# EAGLE board VNP (EAGLE 9.6.2)
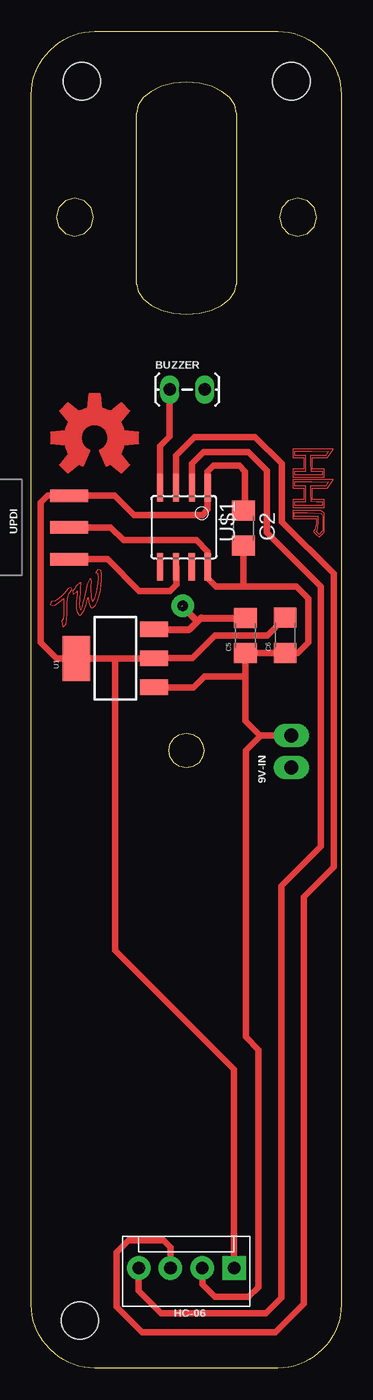
[diagram p0: board, top side]
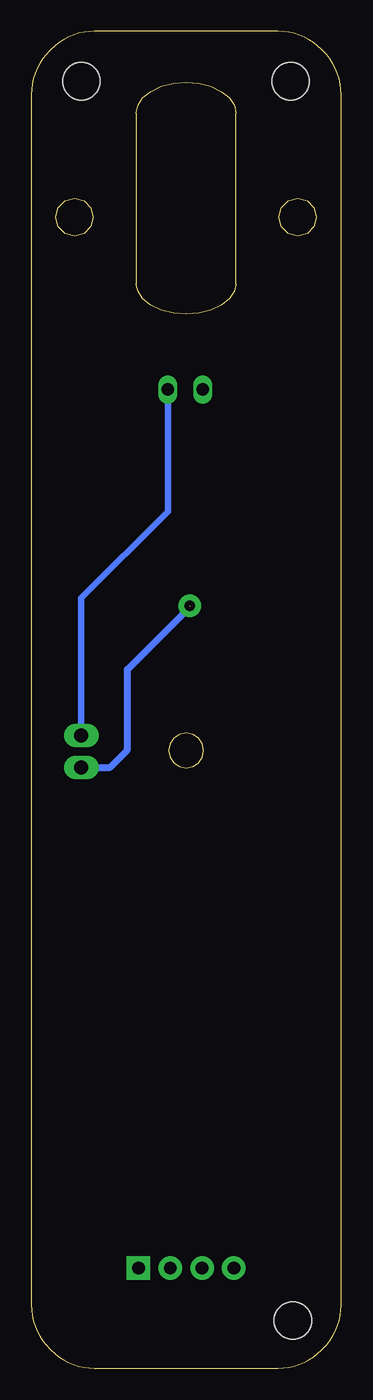
[diagram p1: board, bottom side, seen from below]

Size 24.76 x 106.68 mm. Coordinates in mm from the lower left corner, seen from the top.
Outline: 8.4,86.52 8.53,85.95 8.92,85.35 9.55,84.84 10.39,84.44 11.36,84.19 12.39,84.1 13.42,84.19 14.39,84.44 15.22,84.84 15.85,85.35 16.25,85.95 16.4,86.52
Outline: 16.4,100.13 16.25,100.77
Outline: 16.25,100.77 15.85,101.37 15.22,101.88 14.39,102.28 13.42,102.53 12.39,102.62 11.36,102.53
Outline: 11.36,102.53 10.39,102.28 9.55,101.88 8.92,101.37 8.53,100.77 8.4,100.13
Outline: 16.4,100.14 16.4,86.52
Outline: 8.4,86.52 8.4,100.14
Outline: 4.23,93.15 4.77,92.6 4.98,91.85 4.77,91.1
Outline: 4.23,93.15 4.23,93.15
Outline: 4.23,93.15 3.48,93.35 2.73,93.15 2.18,92.6 1.98,91.85 2.18,91.1 2.73,90.55 3.48,90.35 4.23,90.55 4.77,91.1
Outline: 4.77,91.1 4.77,91.1
Outline: 11.85,50.58 11.4,50.27 11.1,49.82 10.99,49.29 11.1,48.75 11.4,48.3 11.85,48 12.39,47.89 12.92,48 13.37,48.3 13.68,48.75 13.78,49.29 13.68,49.82 13.37,50.27 12.92,50.57 12.39,50.68 11.85,50.57
Outline: 23.22,105.21 23.29,105.14 arc-45 24.76,101.61 24.76,5.07 arc-45 23.29,1.54 23.22,1.46 arc-45 19.69,0 5.07,0 arc-45 1.54,1.46 1.46,1.54 arc-45 0,5.07 0,101.61 arc-45 1.46,105.14 1.54,105.21 arc-45 5.07,106.68 19.69,106.68 arc-45 23.22,105.21
Outline: 22.8,91.85 22.6,92.6 22.05,93.15 21.3,93.35 20.55,93.15 20,92.6 19.8,91.85 20,91.1 20.55,90.55 21.3,90.35 22.05,90.55 22.6,91.1 22.8,91.85
Copper layers (1*16): Top 0.035mm / dielectric 1.5mm / Bottom 0.035mm
Design rules "OthermillDRC_30_deg_v2": minimum track width 6mil, minimum drill 0.8mm, track to track 6mil, track to pad 6mil, pad to pad 6mil, via to via 6mil, smd to smd 0mil, copper to edge 0mil, drill to drill 6mil, minimum pad ring 10mil, minimum via ring 10mil, stop-mask expansion 1mil, vias tented up to drill 30mil, thermal gap 6mil
Net classes: 0 default: width 0.457 mm; 2 vcc: width 0.559 mm
Holes 3 mm at 3.88,3.8 4.05,102.71 20.76,102.71

## Footprints (pad centres in the part's own frame; a part is rotated, then mirrored left to right if it is on the bottom)
1X02_LONGPADS = drill 1.118 pad 1.88 long: 1 0,0; 2 2.54,0
1X02_LOCK_LONGPADS = drill 1.016 long: 1 -0.127,0; 2 2.667,0
C1206 = smd 1.6 x 1.8: 1 -1.4,0; 2 1.4,0
1206 = smd 1.6 x 1.8: 1 -1.4,0; 2 1.4,0
MOLEX-1X4 = drill 1.016 pad 1.88 square: 1 0,0 | drill 1.016 pad 1.88: 2 2.54,0; 3 5.08,0; 4 7.62,0
SOT223 = smd 1.219 x 2.235: 1 -2.311,-3.099; 2 0,-3.099; 3 2.311,-3.099 | smd 3.6 x 2.2: 4 0,3.099
SOIC8 = smd 0.5 x 2.2: 1 -1.905,-3.154; 2 -0.645,-3.154; 3 0.625,-3.154; 4 1.895,-3.154; 5 1.905,3.154; 6 0.635,3.154; 7 -0.635,3.154; 8 -1.905,3.154
1X03_SMD_RA_MALE = smd 1 x 3: 1 -2.54,5; 2 0,5; 3 2.54,5

## Placement (x,y rotation side)
9V-IN  [1X02_LONGPADS]  20.76,47.94 90 top
BUZZER  [1X02_LOCK_LONGPADS]  11.19,78.1 0 top
C2  1uf  [C1206]  16.95,67.04 270 top
C5  10uf  [1206]  17.1,58.47 90 top
C6  10uf  [1206]  20.27,58.49 90 top
HC-06  [MOLEX-1X4]  16.2,8 180 top
U1  VR  [SOT223]  6.7,56.64 90 top
U$1  UC_ATTINY412SI  [SOIC8]  12.19,67.1 180 top
U$2  [OSHW-LOGO-L_COPPER]  5.06,74.24 0 top
UPDI  [1X03_SMD_RA_MALE]  -1.98,67.09 270 top

## Library data of the parts
9V-IN BUZZER = SparkFun-Connectors
C2 U1 = eagle_fab
C5 C6 = 01_SparkFun
HC-06 = SparkFun-Connectors; PROD_ID: CONN-08186; SF_ID: PRT-08231
U$1 = fab_new
U$2 = SparkFun-Aesthetics
UPDI = SparkFun-Connectors; PROD_ID: CONN-10925

## Nets
GND: 9V-IN.2 BUZZER.2 C2.2 C5.1 C6.1 HC-06.2 U1.1 U$1.8 UPDI.2
N$1 [vcc]: 9V-IN.1 C5.2 U1.3
N$2: U$1.6 UPDI.3
N$3: BUZZER.1 U$1.4
N$4: HC-06.3 U$1.3
N$5: HC-06.4 U$1.2
N$8: C2.1 C6.2 HC-06.1 U1.2 U1.4 U$1.1 UPDI.1

## Tracks (layer width: path | path; a pad name or v marks a point on that pad's centre or on a via)
GND
  Top 0.508: 9V-IN.2 18.27,50.48 | 17.11,55.19 17.11,51.64 18.27,50.48 | 17.11,55.19 C5.1 20.25,57.07 C6.1 20.3,57.06 21.3,57.06 22.14,57.89 22.14,61.42 21.17,62.38 16.95,62.38 | 18.27,50.48 18.3,50.45 17.13,49.29 17.13,26.42 18.14,25.42 18.14,6.47 17.36,5.69 14.65,5.69 13.66,6.69 HC-06.2 | 16.95,62.38 14.77,62.38 14.09,63.06 14.09,63.13 14.09,65.17 13.2,66.06 7.37,66.06 6.34,67.09 UPDI.2 | 16.95,62.38 C2.2 | U1.1 12.97,54.33 13.83,55.19 17.11,55.19
  Top 0.559: U$1.8 14.09,63.13
  Bottom 0.508: BUZZER.2 13.85,68.36 20.76,61.45 9V-IN.2
N$1  (1 unrouted)
  Top 0.559: U1.3 12.65,58.96 13.27,59.58 | C5.2 13.56,59.87 13.27,59.58 | 13.27,59.58 12.07,60.78 12.07,60.85
  Bottom 0.559: 9V-IN.1 18.47,47.94 17.08,49.33 17.08,55.76 12.04,60.79
N$2
  Top 0.508: UPDI.3 6.08,64.55 8.6,62.03 11.07,62.03 11.58,62.55 11.58,63.91 U$1.6
N$3
  Top 0.508: 10.26,70.28 U$1.4 10.28,70.26 10.28,73.57 11.06,74.35 BUZZER.1
N$4
  Top 0.508: U$1.3 11.56,72.83 13.05,74.32 17.88,74.32 20.02,72.18 20.02,67.53 24.15,63.4 24.15,39.99 21.76,37.61 21.76,5.14 19.49,2.87 8.85,2.87 6.81,4.91 6.81,9.26 7.77,10.22 10.55,10.22 11.12,9.65 HC-06.3
N$5
  Top 0.508: U$1.2 12.83,72.2 13.75,73.12 17.33,73.12 18.83,71.62 18.83,66.68 23.14,62.37 23.14,41.65 19.97,38.47 19.97,5.63 18.73,4.39 10.38,4.39 8.58,6.19 HC-06.4
N$6  (via drill 0.85 pad 1.8)
  other vias: 12.1,60.83
N$7
  Top 0.01: 2.59,60.73 2.59,60.61 2.57,60.18 2.54,59.75 2.5,59.74 2.41,59.6 2.51,59.18 2.58,59.16 2.77,59.39 2.83,59.79 2.85,60.2 2.86,60.6 2.87,60.86
N$8
  Top 0.508: 6.71,56.64 4.35,56.64 2.02,56.64 0.76,57.9 0.76,69.08 1.31,69.62 UPDI.1 | 6.71,56.64 U1.2 9.83,56.67 12.88,56.67 14.67,58.46 18.84,58.46 C6.2 | C2.1 17.08,68.57 17.08,71.56 16.61,72.03 14.56,72.03 14.09,71.56 U$1.1 14.09,68.51 13.67,68.09 8.21,68.09 6.67,69.63 UPDI.1 | UPDI.1 | HC-06.1 16.2,23.83 6.71,33.32 6.71,56.64
  Top 0.559: U1.4 4.35,56.64
N$9
  Top 0.01: 2.59,60.73 2.6,61.01 2.59,61.41 2.44,61.29 2.19,61.08 1.91,60.91 1.7,60.84 1.53,60.94 1.57,61.16 1.69,61.2 1.9,61.23 2.18,61.4 2.44,61.6 2.64,61.8 2.8,62.03 2.94,62.23 3.18,62.31 3.25,62.15 3.03,61.84 2.89,61.45 2.87,61.03 2.87,60.86
N$10
  Top 0.01: 5.52,62.1 5.52,62.06 5.42,61.62 5.28,61.2 5.15,60.91 4.94,60.68 4.8,60.66 4.7,60.78 4.59,61.13 4.54,61.49 4.49,61.38 4.38,60.91 4.23,60.45 3.93,60.09 3.83,60.1 3.65,60.33 3.59,60.63 3.58,61.05 3.59,61.2
N$11
  Top 0.01: 3.88,61.33 3.89,61.43 3.92,61.88 3.96,62.26 3.98,62.65 3.88,62.71 3.55,62.38 3.45,62.19 3.31,62.03 3.34,61.78 3.61,61.94 3.66,62.01 3.64,61.74 3.61,61.47 3.59,61.2
N$12
  Top 0.01: 5.18,61.94 5.15,61.77 5.03,61.36 4.9,61.16 4.81,61.56 4.8,61.76 | 4.22,61.49 | 4.8,61.76 4.79,61.96 4.79,62.37 4.8,62.78 4.78,62.98 4.65,62.96 4.47,62.58 4.37,62.17 4.28,61.78 4.22,61.49 | 4.8,61.76 | 4.22,61.49 4.2,61.41 4.11,61.04 4.06,60.83 3.93,60.51 3.87,60.99 3.88,61.33
N$13
  Top 0.01: 5.34,63.74 5.14,63.51 5.16,63.47 5.23,63.48 5.28,63.44 5.32,63.03 5.3,62.61 5.24,62.19 5.18,61.94 | 5.52,62.1 5.59,62.5 5.63,62.94 5.63,63.39 5.56,63.65
  Top 0.025: 5.56,63.65 5.34,63.74
N$14
  Top 0.001: 20.9,67.8 22.77,67.8 22.77,67.42 22.65,66.9 22.52,66.77 22.73,66.55 22.99,66.33 23.22,66.52 23.41,66.71 23.41,68.23 23.27,68.34 23.13,68.44 20.9,68.44 20.9,67.8
N$15
  Top 0.001: 22.06,68.28 23.18,68.2 23.29,67.97 23.29,67.46 23.29,66.82 23.14,66.68 22.99,66.53 22.87,66.65 22.76,66.77 22.84,66.86 22.93,67.46 22.93,67.96 21.02,67.96 21.02,68.28 22.06,68.28
N$16
  Top 0.001: 23.41,68.68 23.41,69.31 22.45,69.31 22.45,70.23 23.63,70.23 23.79,70.44 24.04,70.78 24.13,70.9 20.9,70.9 20.9,70.23 21.78,70.23 21.78,69.31 20.9,69.31 20.9,68.68 23.41,68.68
N$17
  Top 0.001: 21.06,69.15 21.94,69.15 21.94,70.39 21.06,70.39 21.06,70.75 22.39,70.75 23.73,70.73 23.62,70.55 23.52,70.39 22.9,70.39 22.29,70.39 22.3,69.78 22.32,69.17 22.78,69.16 23.25,69.15 23.25,68.84 21.06,68.84 21.06,69.15
N$18
  Top 0.001: 23.41,71.1 23.41,71.74 22.45,71.74 22.45,72.65 23.04,72.65 23.63,72.66 23.88,72.99 24.12,73.33 20.9,73.33 20.9,72.65 21.78,72.65 21.78,71.74 20.9,71.74 20.9,71.1 23.41,71.1
N$19
  Top 0.001: 21.94,71.58 21.94,72.81 21.06,72.81 21.06,73.17 22.39,73.17 23.73,73.15 23.62,72.97 23.52,72.81 22.29,72.81 22.3,72.21 22.32,71.6 22.78,71.59 23.25,71.58 23.25,71.26 21.06,71.26 21.06,71.58 21.94,71.58